# Altium PCB Receiver_v3.PcbDoc
Units mm, origin at the board's own origin, x right, y up, seen from the top; angles counter-clockwise.
Board outline 73.02 x 69.22 mm, 2 copper layers (Top Layer, Bottom Layer); 10 components, 15 nets, 84 pads, 2 vias.
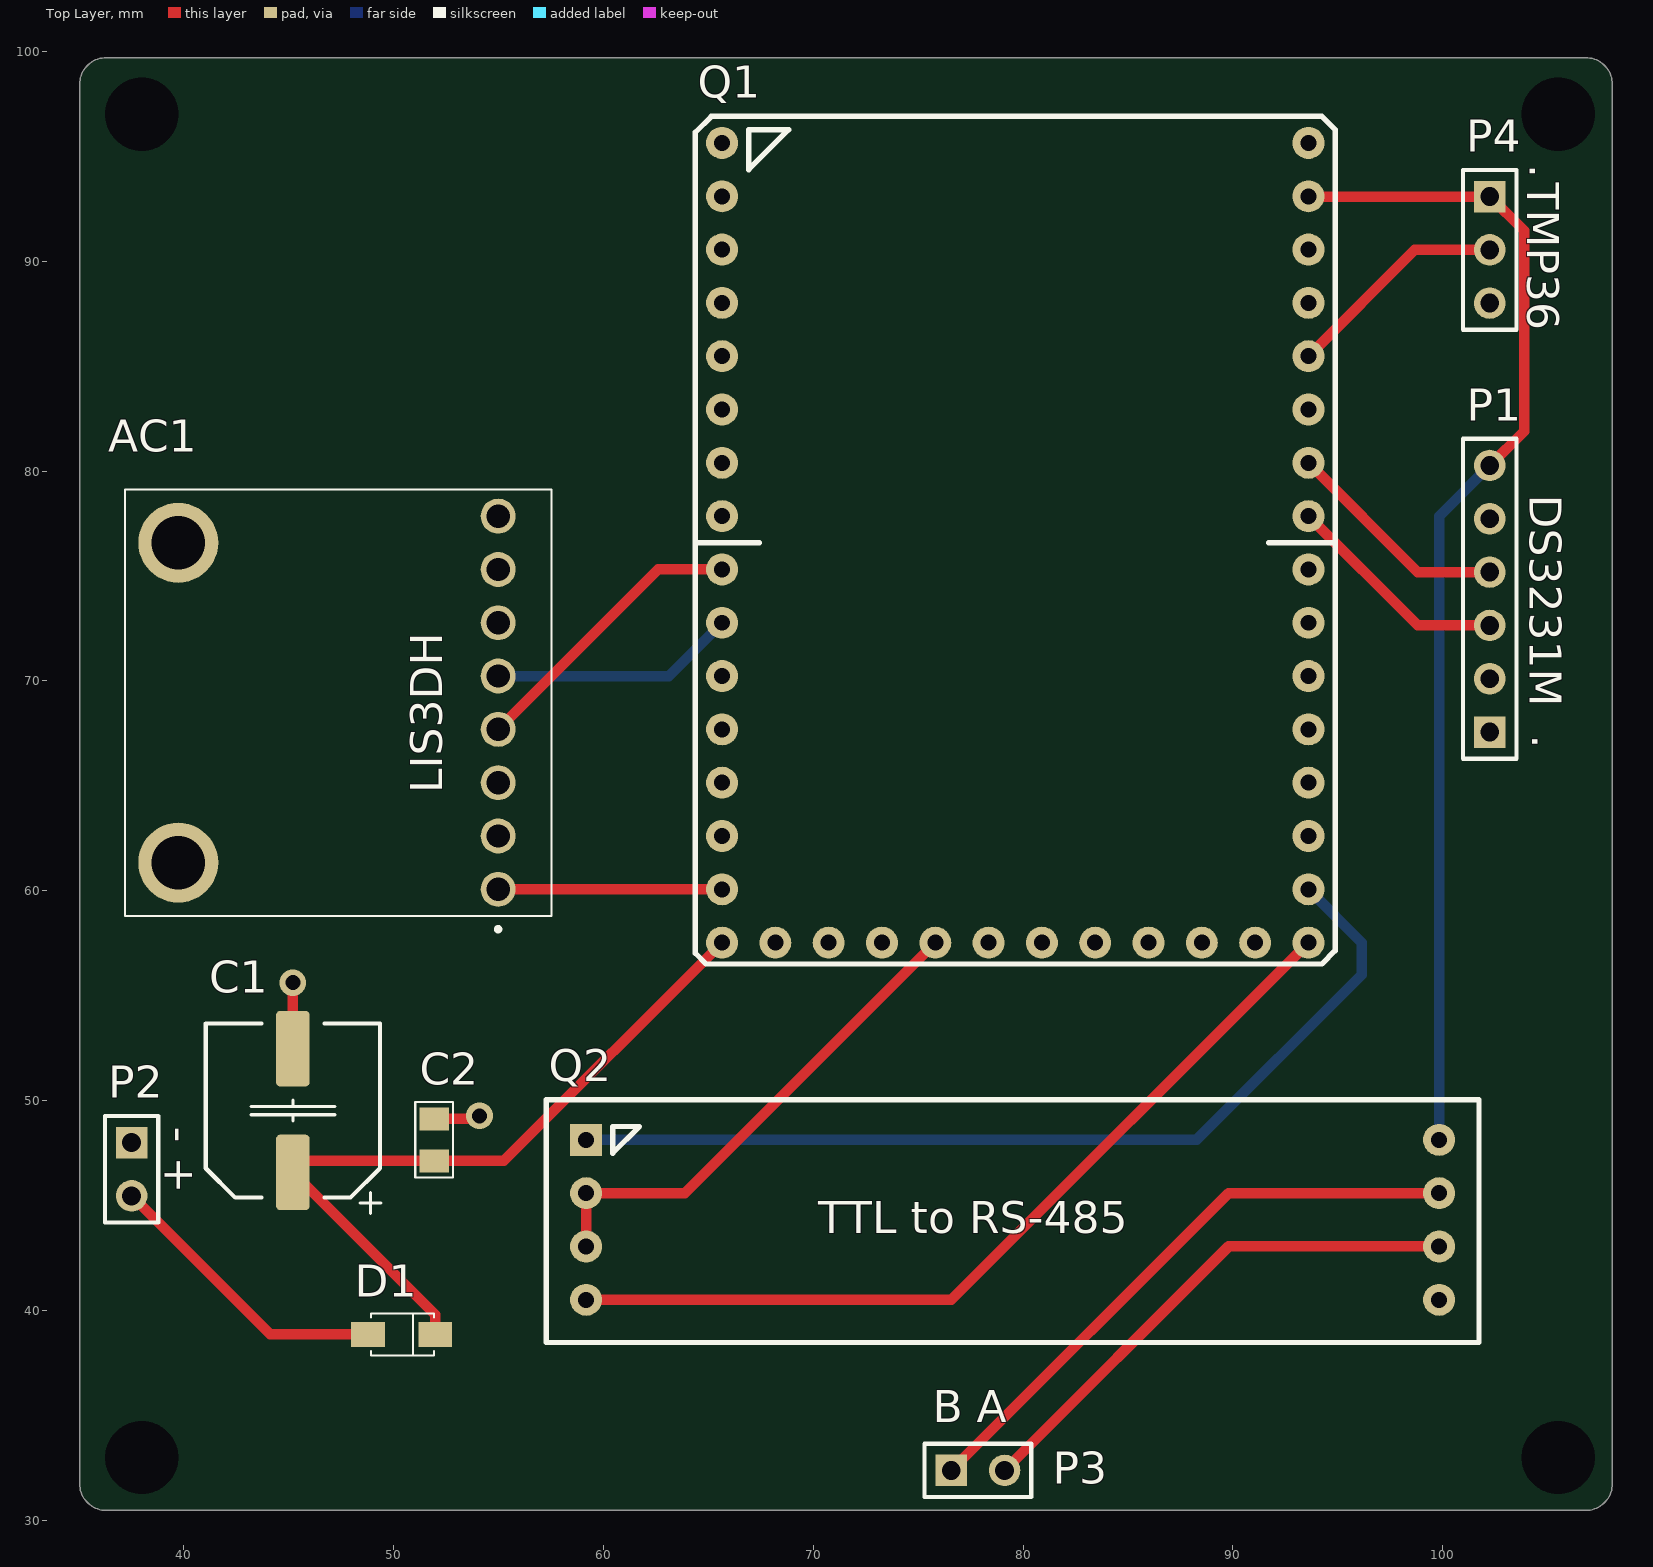
[diagram p0: Top Layer view]
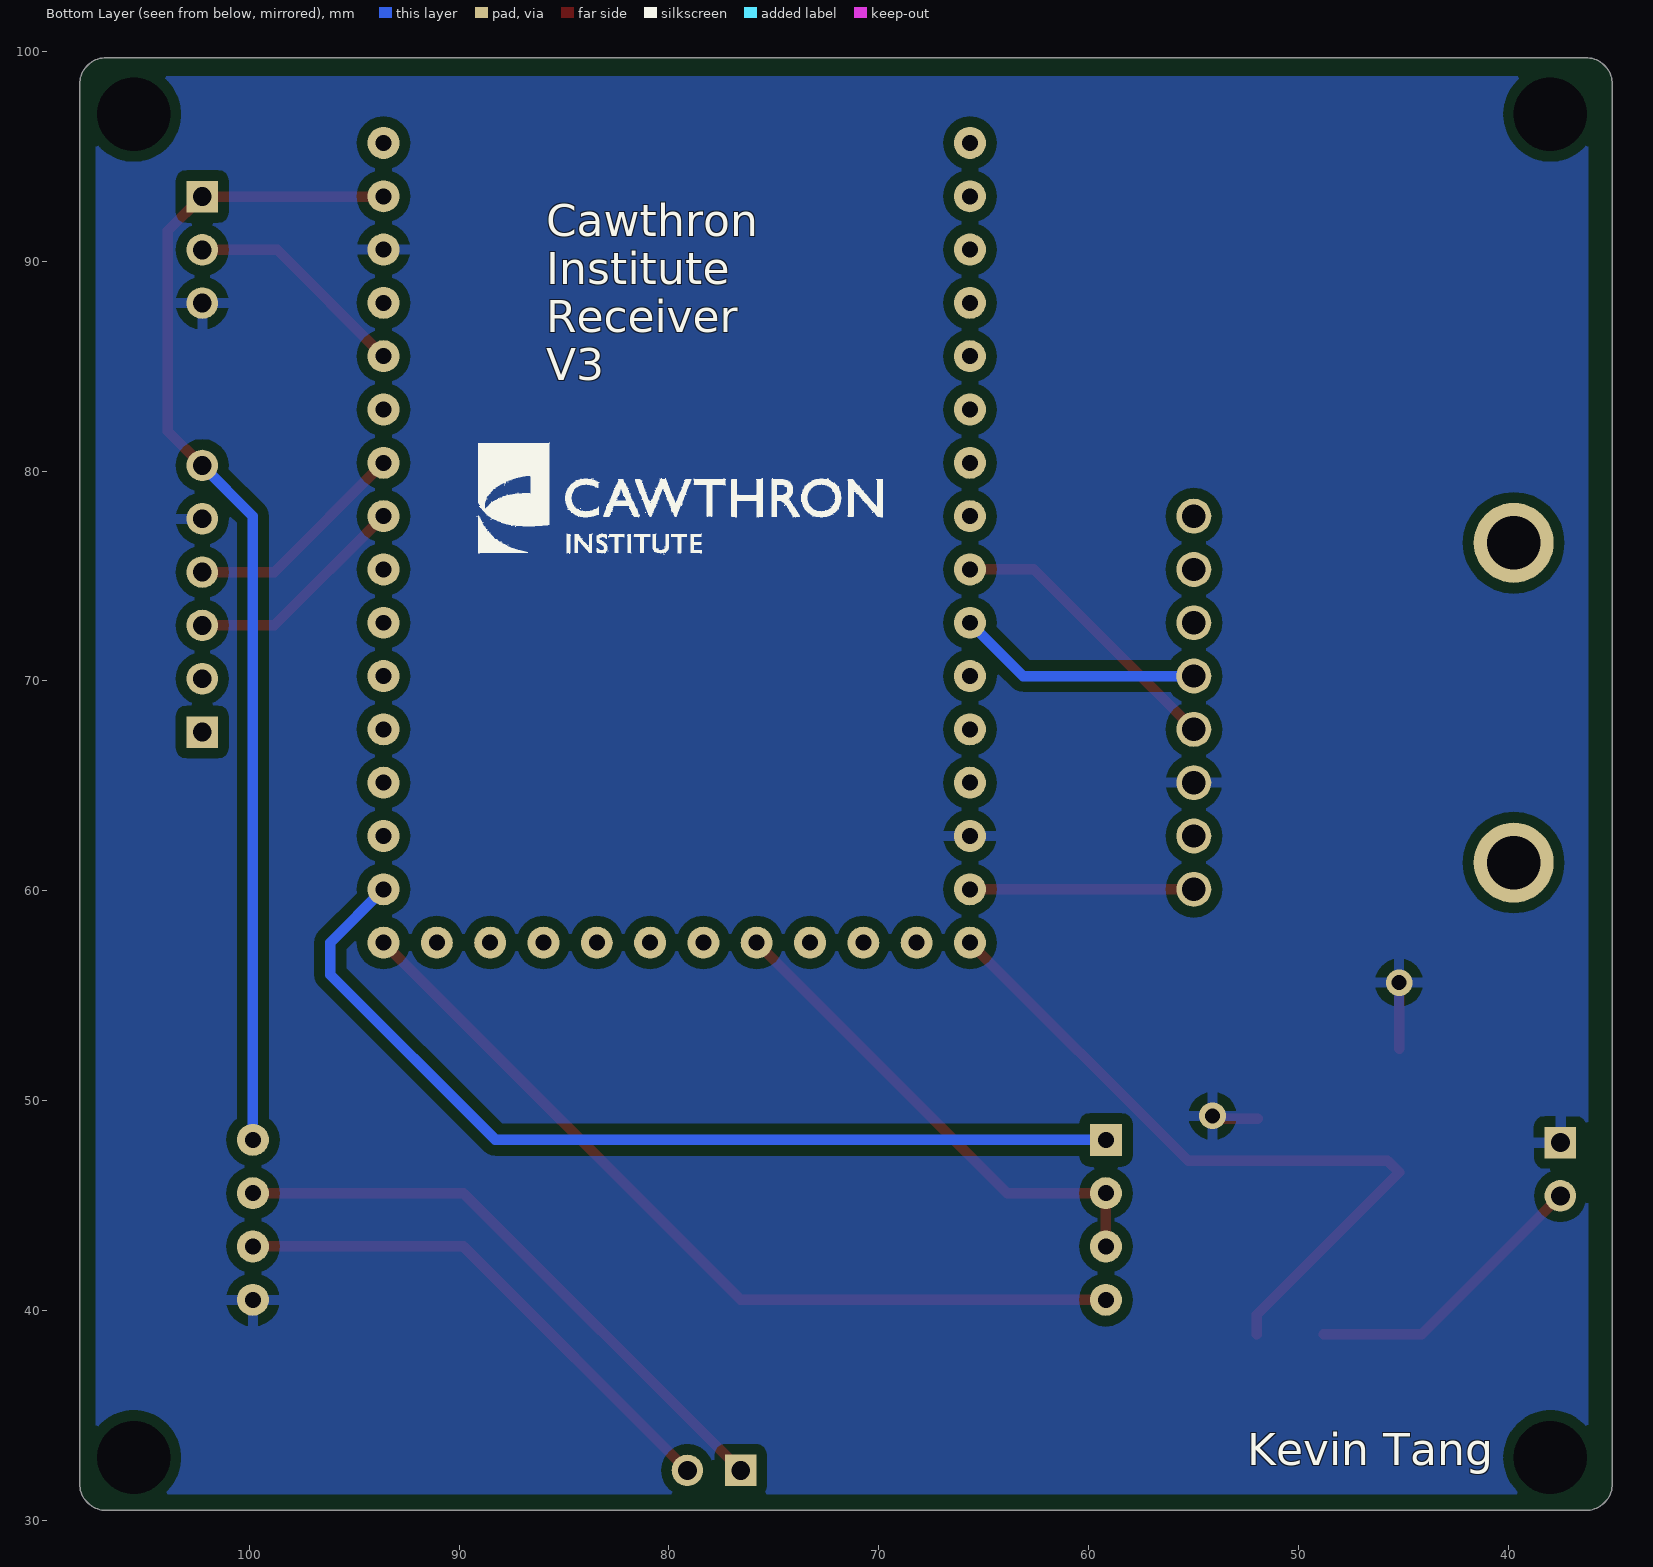
[diagram p1: Bottom Layer view, seen from below]

## Layer stack, top to bottom
Top Solder: solder mask 0.0102, Solder Resist, Dk 3.5
Top Layer: signal copper 0.0356
Dielectric 1: dielectric 0.32, FR-4, Dk 4.8
Bottom Layer: signal copper 0.0356
Bottom Solder: solder mask 0.0102, Solder Resist, Dk 3.5

## Board outline
35.052,31.75 ccw(c36.322,31.75) 36.322,30.48 106.807,30.48 ccw(c106.807,31.75) 108.077,31.75 108.077,98.425 ccw(c106.807,98.425) 106.807,99.695 36.322,99.695 ccw(c36.322,98.425) 35.052,98.425

## Design rules (kind name [scope] priority, off if disabled: settings)
Clearance [All] p1: gap=0.5 ignorepadtopadclearanceinfootprint=FALSE
HoleSize [All] p1: absolutevalues=TRUE maxlimit=6 minlimit=0.025 maxpercent=80.000 minpercent=20.000
PolygonConnect [All] p1: connectstyle=Relief reliefconductorwidth=0.5 reliefentries=4 polygonreliefangle="90 Angle" airgapwidth=0.5
RoutingVias [All] p1: holewidth=0.7 width=1.7 viastyle="Through Hole" minholewidth=0.6 minwidth=1.2 maxholewidth=1 maxwidth=2.2
SilkToSilkClearance [All] p1: silktosilkclearance=0.1
SilkToSolderMaskClearance [IsPad] p1: minsilkscreentomaskgap=0.1 clearancetoexposedcopper=TRUE
SolderMaskExpansion [All] p1: expansion=0.102
Width [All] p1: maxlimit=0.7 minlimit=0.2 preferedwidth=0.5
27 further rules are at their usual default settings.

## Components (designator, comment, footprint, x,y, rotation, side; value= is the part's Value field where it differs from the comment)
AC1 "2809" 2809 54.991,60.071 r90 top
C1 "CAP ALUM 22UF 20% 50V SMD" "CAP POL 8x5.4mm SMT" 45.212,49.53 r90 top
C2 "100nF" "0805 CAP" 51.943,48.133 r90 top
D1 "1N4148W-7-F" SOD123 50.441,38.862 r0 top
P1 "DS3231M" HDR1X6 102.235,67.564 r90 top
P2 "Battery" HDR1X2 37.531,48.006 r270 top
P3 "Header 2" HDR1X2 76.581,32.385 r0 top
P4 "TMP36" HDR1X3 102.235,93.079 r270 top
Q1 "PYBv1.1" PCBComponent_1#1 65.659,57.531 r0 top
Q2 "TTL to RS485" PCBComponent_1#2 59.182,40.513 r0 top

## Footprints (in the part's own frame and the unit in brackets; to place one, negate y for a bottom-side part, rotate by r counter-clockwise, add the part's x,y. Pads: shape width x height; smd on the part's side, far side on the other; paste and mask are expansions set on the pad)
"0805 CAP" [mm] "http://www.digikey.co.nz/Web%20Export/Supplier%20Content/Vishay_8026/PDF/VishayBeyschlag_SolderPad.pdf?redirected=1 with dimension G modified by +0.25mm"
  rect 1.1x1.4 smd: 1(-1,0) 2(1,0)
  silkscreen extent -1.8,-0.9 1.8,0.9, body extent -1.04,-0.66 1.04,0.66, height 0.61
2809 [mm]
  round 1.665 hole 1.11: 1(0,0) 2(2.54,0) 3(5.08,0) 4(7.62,0) 5(10.16,0) 6(12.7,0) 7(15.24,0) 8(17.78,0)
  round 3.81 hole 2.54: MH1(1.27,15.24) MH2(16.51,15.24)
  silkscreen extent -2,-2.54 19.05,17.78, body extent -1.27,-2.54 19.05,17.78, height 5
"CAP POL 8x5.4mm SMT" [mm]
  round 0.508 on Mech15: 0(0,0)
  rrect25% 3.6x1.6 smd: 1(-2.95,0) 2(2.95,0)
  silkscreen extent -4.9,-4.2 4.15,4.15, body extent -4.5,-4.15 4.5,4.15, height 5.4
HDR1X2 [mm] "Connector; Header; 2 Position"
  rect 1.5x1.5 hole 0.9: 1(0,0)
  round 1.5 hole 0.9: 2(2.54,0)
  silkscreen extent -1.27,-1.27 3.81,1.27
HDR1X3 [mm] "Connector; Header; 3 Position"
  rect 1.5x1.5 hole 0.9: 1(0,0)
  round 1.5 hole 0.9: 2(2.54,0) 3(5.08,0)
  silkscreen extent -1.27,-1.27 6.35,1.27
HDR1X6 [mm] "Connector; Header; 6 Position"
  rect 1.5x1.5 hole 0.9: 1(0,0)
  round 1.5 hole 0.9: 2(2.54,0) 3(5.08,0) 4(7.62,0) 5(10.16,0) 6(12.7,0)
  silkscreen extent -1.27,-1.27 13.97,1.27
PCBComponent_1#1 [mil]
  round 60 hole 30: 1(0,1500) 2(0,1400) 3(0,1300) 4(0,1200) 5(0,1100) 6(0,1000) 7(0,900) 8(0,800) 9(0,700) 10(0,600) 11(0,500) 12(0,400) 13(0,300) 14(0,200) 15(0,100) 16(0,0) 17(1100,1500) 18(1100,1400) 19(1100,1300) 20(1100,1200) 21(1100,1100) 22(1100,1000) 23(1100,900) 24(1100,800) 25(1100,700) 26(1100,600) 27(1100,500) 28(1100,400) 29(1100,300) 30(1100,200) 31(1100,100) 32(1100,0) 33(100,0) 34(200,0) 35(300,0) 36(400,0) 37(500,0) 38(600,0) 39(700,0) 40(800,0) 41(900,0) 42(1000,0)
  silkscreen extent -50,-40 1150,1550
PCBComponent_1#2 [mil]
  rect 60x60 hole 30: 1(0,300)
  round 60 hole 30: 2(0,200) 4(0,0) 5(1600,300) 6(1600,200) 7(1600,100) 8(1600,0)
  round 60 hole 30 mask+4: 3(0,100)
  silkscreen extent -75,-80 1675,375
SOD123 [mm] "SOD-123; 2 Leads; Body 2.7 x 1.6 mm, (LxW)"
  rect 1.6x1.2 smd: 1(-1.65,0) 2(1.55,0)
  silkscreen extent -1.5,-1 1.5,1, body extent -1.8,-0.86 1.8,0.86, height 1.21

## Part data
AC1: "Accelerometer", Manufacturer_Name=Adafruit, Mouser Part Number=485-2809, Allied_Number=70929317, Allied Price/Stock=https://www.alliedelec.com/adafruitindustries-2809/70929317/, Datasheet Link=http://www.mouser.com/datasheet/2/737/adafruit-lis3dh-triple-axis-accelerometer-breakout-780345.pdf, Height=5mm, Manufacturer_Part_Number=2809, Mouser Price/Stock=https://www.mouser.com/Search/Refine.aspx?Keyword=485-2809
C1: library part "SMT-CAP 22uF/35V SM", Capacitance 1="47 µF", ESR (Equivalent Series Resistance)=-, Lifetime @ Temp.="2000 Hrs @ 85°C", Manufacturer=Nichicon, Manufacturer Part Number=UWX1V220MCL1GB, Operating Temperature="-40°C ~ 85°C", Package / Case="Radial, Can - SMD", Supplier Part Number 1=493-2118-1-ND, Tolerance=±20%, Applications="General Purpose", Category=Capacitors, ComponentLink1Description=http://nichicon-us.com/english/products/pdfs/e-uwx.pdf, ComponentLink1URL=http://nichicon-us.com/english/products/pdfs/e-uwx.pdf, Height - Seated (Max)="0.213\" (5.40mm)", Lead Spacing=-, Mounting Type="Surface Mount", Packaging="Cut Tape (CT)", Part Status=Active, Polarization=Polar, Pricing 1="1=0.59, 10=0.406, 100=0.2304, 500=0.16268 (NZD)", Ratings=-, Revision="July-2002: Re-released for DXP Platform.", RoHS="RoHS Compliant", Size / Dimension="0.248\" Dia (6.30mm)", Stock 1=680, Supplier 1=Digi-Key, Surface Mount Land Size="0.260\" L x 0.260\" W (6.60mm x 6.60mm)"
C2: library part "SMT- Cap", "SMT Capacitor Non Polarised"
D1: library part "SMT-Diode 1N4148W-7-F", "DIODE GEN PURP 100V 300MA SOD123", Base Part Number=1N4148W, Capacitance @ Vr, F="2pF @ 0V, 1MHz", Current - Average Rectified (Io)=150mA, Manufacturer="Diodes Incorporated", Manufacturer Part Number=1N4148W-13-F, Operating Temperature - Junction="-65°C ~ 150°C", Package / Case=SOD-123, Supplier Part Number 1=1N4148W-13FDICT-ND, Category="Discrete Semiconductor Products", ComponentLink1Description=https://www.diodes.com/assets/Datasheets/ds30086.pdf, ComponentLink1URL=https://www.diodes.com/assets/Datasheets/ds30086.pdf, Diode Type=Standard, Mounting Type="Surface Mount", Packaging="Cut Tape (CT)", Part Status=Active, Pricing 1="1=0.33, 10=0.292, 100=0.1586, 500=0.0976, 1000=0.06656 (NZD)", RoHS="RoHS Compliant", Speed="Small Signal =< 200mA (Io), Any Speed", Stock 1=5282, Supplier 1=Digi-Key, Supplier Device Package=SOD-123
P1: library part "Header 6", "Header, 6-Pin", LatestRevisionDate=17-Jul-2002, LatestRevisionNote="Re-released for DXP Platform.", Publisher="Altium Limited"
P2: library part "Header 2", "Header, 2-Pin", LatestRevisionDate=17-Jul-2002, LatestRevisionNote="Re-released for DXP Platform.", Publisher="Altium Limited"
P3: "Header, 2-Pin", LatestRevisionDate=17-Jul-2002, LatestRevisionNote="Re-released for DXP Platform.", Publisher="Altium Limited"
P4: library part "Header 3", "Header, 3-Pin", LatestRevisionDate=17-Jul-2002, LatestRevisionNote="Re-released for DXP Platform.", Publisher="Altium Limited"
Q1: "Microcontroller"
Q2: "Converter"

## Free pads (board coordinates)
  round 1.524 hole 3.5: 2(38,97) 3(105.5,97) 4(38,33) 5(105.5,33)

## Via types
v1: diameter 1.27, hole 0.711, Top Layer to Bottom Layer, 2 vias

## Nets (pads, with @x,y where several pads share a name; then routed paths per layer and width w, separated by ;. In a path a pad name is that pad's centre, name@x,y a point inside that pad or via, vN(x,y) a via of type N, cw(c..) or ccw(c..) an arc to the next point about the centre after c; other vN are vias at no path point)
GND: AC1.3 C1.2 C2.2 P1.5 P2.1 P4.3 Q1.14 Q1.19 Q2.8 | length 5.4
  Top Layer w0.5: C1.2 v1(45.212,55.626) ; C2.2 53.959,49.133 v1(54.102,49.276)
NetAC1_1: AC1.1 Q1.15 | length 10.7
  Top Layer w0.5: AC1.1 Q1.15
NetAC1_4: AC1.4 Q1.9 | length 13.8
  Top Layer w0.5: AC1.4 62.611,75.311 Q1.9
NetAC1_5: AC1.5 Q1.10 | length 11.7
  Bottom Layer w0.5: AC1.5 63.119,70.231 Q1.10
NetC1_1: C1.1 C2.1 D1.2 Q1.16 | length 35.5
  Top Layer w0.5: D1.2 51.991,39.801 C1.1 45.765,47.133 C2.1 55.261,47.133 Q1.16
NetD1_1: D1.1 P2.2 | length 14
  Top Layer w0.5: P2.2 44.135,38.862 D1.1
NetP1_3: P1.3 Q1.24 | length 10.8
  Top Layer w0.5: Q1.24 98.806,72.644 P1.3
NetP1_4: P1.4 Q1.23 | length 10.8
  Top Layer w0.5: Q1.23 98.806,75.184 P1.4
NetP1_6: P1.6 P4.1 Q1.18 Q2.5 | length 55.9
  Top Layer w0.5: Q1.18 93.611,93.079 P4.1 103.874,91.44 103.874,81.903 P1.6
  Bottom Layer w0.5: Q2.5 99.822,77.851 P1.6
NetP3_1: P3.1 Q2.6 | length 28.7
  Top Layer w0.5: P3.1 89.789,45.593 Q2.6
NetP3_2: P3.2 Q2.7 | length 25.1
  Top Layer w0.5: P3.2 89.789,43.053 Q2.7
NetP4_2: P4.2 Q1.21 | length 10.7
  Top Layer w0.5: Q1.21 98.667,90.539 P4.2
NetQ1_31: Q1.31 Q2.1 | length 45.3
  Bottom Layer w0.5: Q2.1 88.265,48.133 96.139,56.007 96.139,57.531 Q1.31
NetQ1_32: Q1.32 Q2.4 | length 41.5
  Top Layer w0.5: Q2.4 76.581,40.513 Q1.32
NetQ1_36: Q1.36 Q2.2 Q2.3 | length 24.1
  Top Layer w0.5: Q2.3 Q2.2 63.881,45.593 Q1.36
pads on no net: AC1.2 AC1.6 AC1.7 AC1.8 AC1.MH1 AC1.MH2 C1.0 P1.1 P1.2 Q1.1 Q1.2 Q1.3 Q1.4 Q1.5 Q1.6 Q1.7 Q1.8 Q1.11 Q1.12 Q1.13 Q1.17 Q1.20 Q1.22 Q1.25 Q1.26 Q1.27 Q1.28 Q1.29 Q1.30 Q1.33 Q1.34 Q1.35 Q1.37 Q1.38 Q1.39 Q1.40 Q1.41 Q1.42

## Polygon pours and split planes (outlines as drawn)
GND on Bottom Layer "GND Plane" (solid, pour order 0): 107.315,33.782 cw(c104.775,33.782) 104.775,31.242 38.481,31.242 cw(c38.481,33.528) 36.195,33.528 36.195,97.155 cw(c37.846,97.155) 37.846,98.806 106.807,98.806 cw(c106.807,98.298) 107.315,98.298

## Silkscreen, mask and mechanical layers (free items; w line width, h text height)
Top Overlay:
  text "." at 104.14,94.615 h1.52 r270
  text "TMP36" at 104.013,93.726 h1.52 r270
  text "DS3231M" at 104.14,78.867 h1.52 r270
  text "." at 104.267,67.437 h1.52 r270
  text "LIS3DH" at 52.324,64.643 h1.52 r90
  text "- +" at 39.116,48.768 h1.52 r270
  text "B A" at 75.692,34.671 h1.52
Bottom Overlay:
  drawing of 1887 lines, arcs and shapes, not listed
  text "Cawthron / Institute / Receiver / V3" at 85.852,84.328 h1.52
  text "Kevin Tang" at 52.451,32.639 h1.52
Mechanical 1:
  lines w0.254: 35.052,31.75 ccw(c36.322,31.75) 36.322,30.48 106.807,30.48 ccw(c106.807,31.75) 108.077,31.75 108.077,98.425 ccw(c106.807,98.425) 106.807,99.695 77.47,99.695 36.322,99.695 ccw(c36.322,98.425) 35.052,98.425 35.052,31.75

## Text inside footprints (layer, text, board x,y; h text height)
Q2: Top Overlay "TTL to RS-485" at 70.231,43.688 h1.52